# EAGLE board final_PCB (EAGLE 9.2.0)
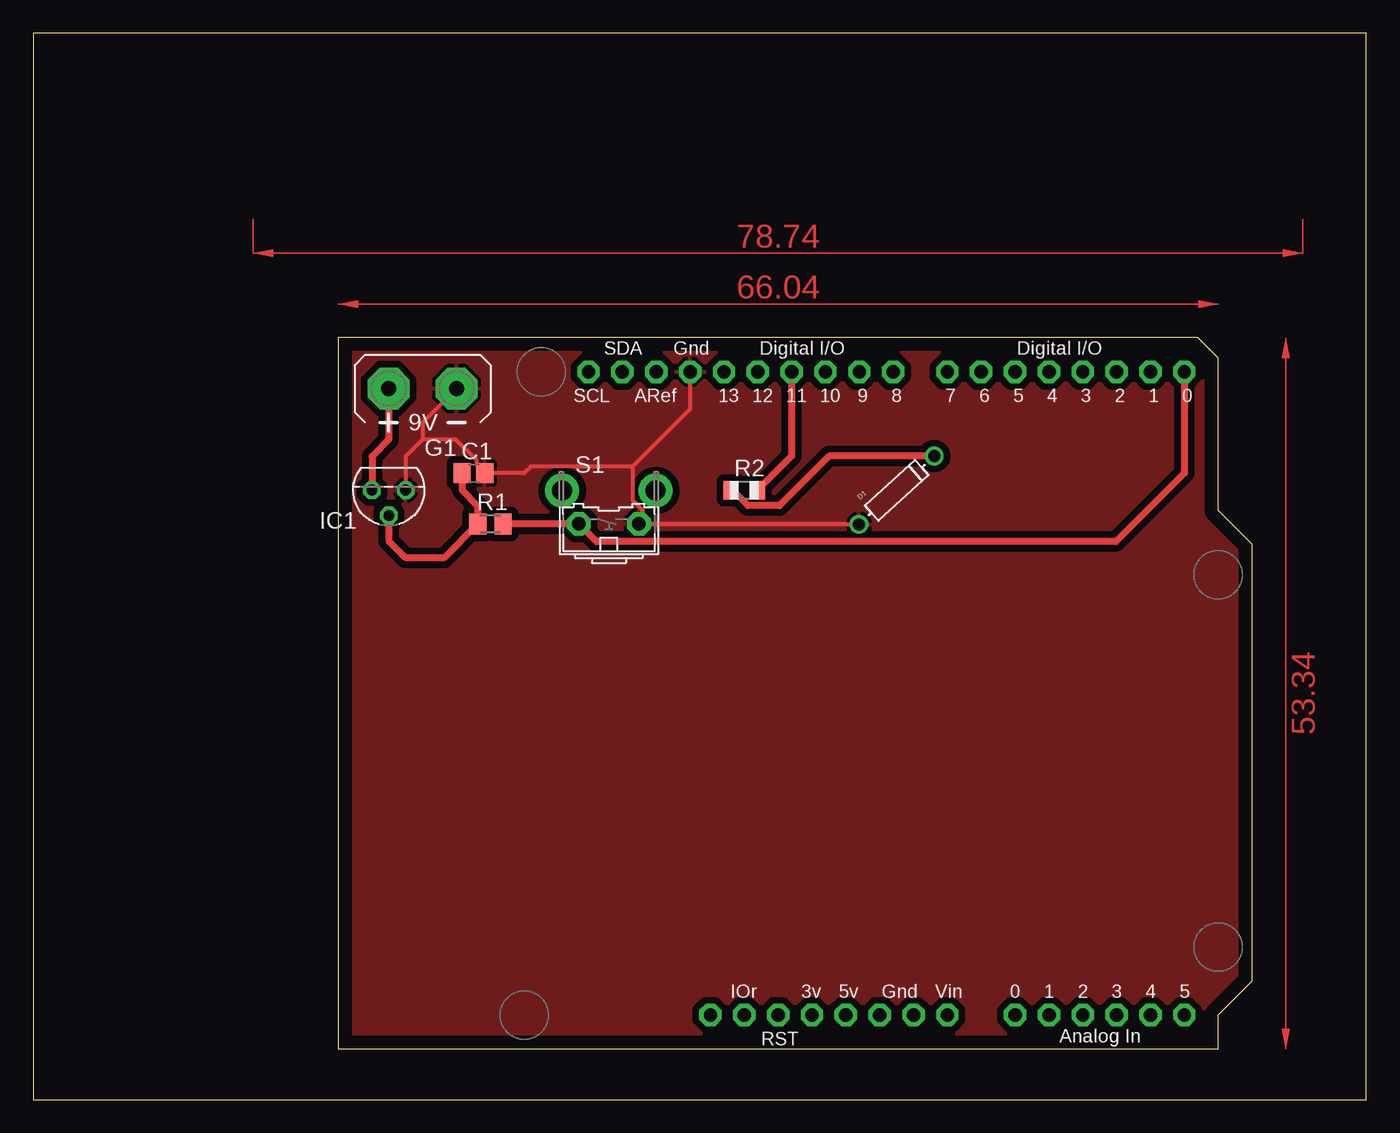
[diagram p0: board, top side]

Size 100 x 80 mm. Coordinates in mm from the lower left corner, seen from the top.
Outline: 0,0 100,0 100,80 0,80 0,0
Copper layers (1*16): Top 0.035mm / dielectric 1.5mm / Bottom 0.035mm
Design rules "default *": minimum track width 6mil, minimum drill 0.35mm, track to track 20mil, track to pad 20mil, pad to pad 20mil, via to via 20mil, smd to smd 6mil, copper to edge 40mil, drill to drill 6mil, minimum pad ring 10mil, minimum via ring 8mil, stop-mask expansion 4mil, vias tented up to drill 0mil, thermal gap 10mil
Net classes: 0 default: width 0.305 mm, drill 0.508 mm, clearance 0.305 mm

## Footprints (pad centres in the part's own frame; a part is rotated, then mirrored left to right if it is on the bottom)
C0805 = smd 1.3 x 1.5: 1 -0.85,0; 2 0.85,0
DO-1N4148 = drill 0.9: A -3.81,0; C 3.81,0
AB9V = drill 1.118 pad 3.15 octagon: + 0,2.54; - 0,-2.54
TO92 = drill 0.813 octagon: 1 -1.27,0; 2 0,1.905; 3 1.27,0
M0805 = smd 1.3 x 1.6: 1 -0.95,0; 2 0.95,0
R0805 = smd 1.1 x 1.4: 1 -1,0; 2 1,0
B3F-31XX = drill 1.016 pad 1.778 octagon: 1 -2.261,-1.245; 2 2.261,-1.245 | drill 1.499 pad 2.54: 3 -3.505,1.245; 4 3.505,1.245
ARDUINOR3 = drill 1 pad 1.676 octagon: 3V 35.56,2.54; 5V 38.1,2.54; A0 50.8,2.54; A1 53.34,2.54; A2 55.88,2.54; A3 58.42,2.54; A4 60.96,2.54; A5 63.5,2.54; AREF 23.876,50.8; D0 63.5,50.8; D1 60.96,50.8; D2 58.42,50.8; D3 55.88,50.8; D4 53.34,50.8; D5 50.8,50.8; D6 48.26,50.8; D7 45.72,50.8; D8 41.656,50.8; D9 39.116,50.8; D10 36.576,50.8; D11 34.036,50.8; D12 31.496,50.8; D13 28.956,50.8; GND 26.416,50.8; GND1 43.18,2.54; GND2 40.64,2.54; IOREF 30.48,2.54; RESERVED 27.94,2.54; RESET 33.02,2.54; SCL 18.796,50.8; SDA 21.336,50.8; VIN 45.72,2.54

## Placement (x,y rotation side)
C1  [C0805]  33.02,46.99 0 top
D1  [DO-1N4148]  64.77,45.72 42.2 top
G1  AB9V  [AB9V]  29.21,53.34 90 top
IC1  LM317LZ  [TO92]  26.67,45.72 180 top
R1  [M0805]  34.29,43.18 0 top
R2  100k  [R0805]  53.34,45.72 0 top
S1  [B3F-31XX]  43.18,44.45 0 top
U1  ARDUINOR3-DIMENSION  [ARDUINOR3]  22.86,3.81 0 top

## Library data of the parts
C1 D1 R1 R2 S1 U1 = adafruit
G1 = battery
IC1 = linear

## Nets
3V: U1.3V
5V: U1.5V
GND: C1.2 D1.A G1.- IC1.1 S1.2 U1.GND
GND1: U1.GND1
GND2: U1.GND2
N$1: G1.+ IC1.3
N$2: R2.2 U1.D11
N$3: C1.1 IC1.2 R1.1
N$4: R1.2 S1.1 U1.D0
N$5: D1.C R2.1
VIN: U1.VIN

## Tracks (layer width: path | path; a pad name or v marks a point on that pad's centre or on a via)
GND
  Top 0.305: G1.- 29.21,50.8 29.21,49.53 | 29.21,49.53 27.94,48.26 IC1.1 | D1.A 60.96,43.16 | 60.96,43.16 45.48,43.16 | 45.48,43.16 S1.2 60.91,43.2 60.96,43.16 | U1.GND 49.28,51.82 44.96,47.5 | 45.48,43.16 45.72,43.4 45.72,44.22 44.96,44.98 44.96,47.5 | 29.21,49.53 31.68,49.53 33.28,47.93 33.28,47.58 C1.2 36.83,46.99 37.34,47.5 44.96,47.5
  pour Top: 1.27,78.74 1.27,2.54 96.52,2.54 96.52,78.74
N$1
  Top 0.508: G1.+ 26.67,49.53 25.4,48.26 IC1.3
N$2
  Top 0.305: U1.D11 56.9,54.86
  Top 0.508: U1.D11 56.9,48.28 R2.2
N$3
  Top 0.508: C1.1 32.17,45.72 33.34,44.55 R1.1 30.8,40.64 27.94,40.64 26.67,41.91 IC1.2
N$4
  Top 0.305: S1.1 40.89,43.18
  Top 0.508: U1.D0 86.36,46.99 81.23,41.86 42.27,41.86 S1.1 | 40.89,43.18 R1.2
N$5
  Top 0.305: 52.44,45.72 R2.1
  Top 0.508: D1.C 59.71,48.28 55.99,44.56 53.6,44.56 52.44,45.72
(copper drawn outside any net)
  shapes: Top area x3